# Altium PCB PCB1.PcbDoc
Units mm, origin at the board's own origin, x right, y up, seen from the top; angles counter-clockwise.
Board outline 147 x 102 mm, 2 copper layers (Top Layer, Bottom Layer); 6 components, 8 nets, 22 pads, 0 vias.
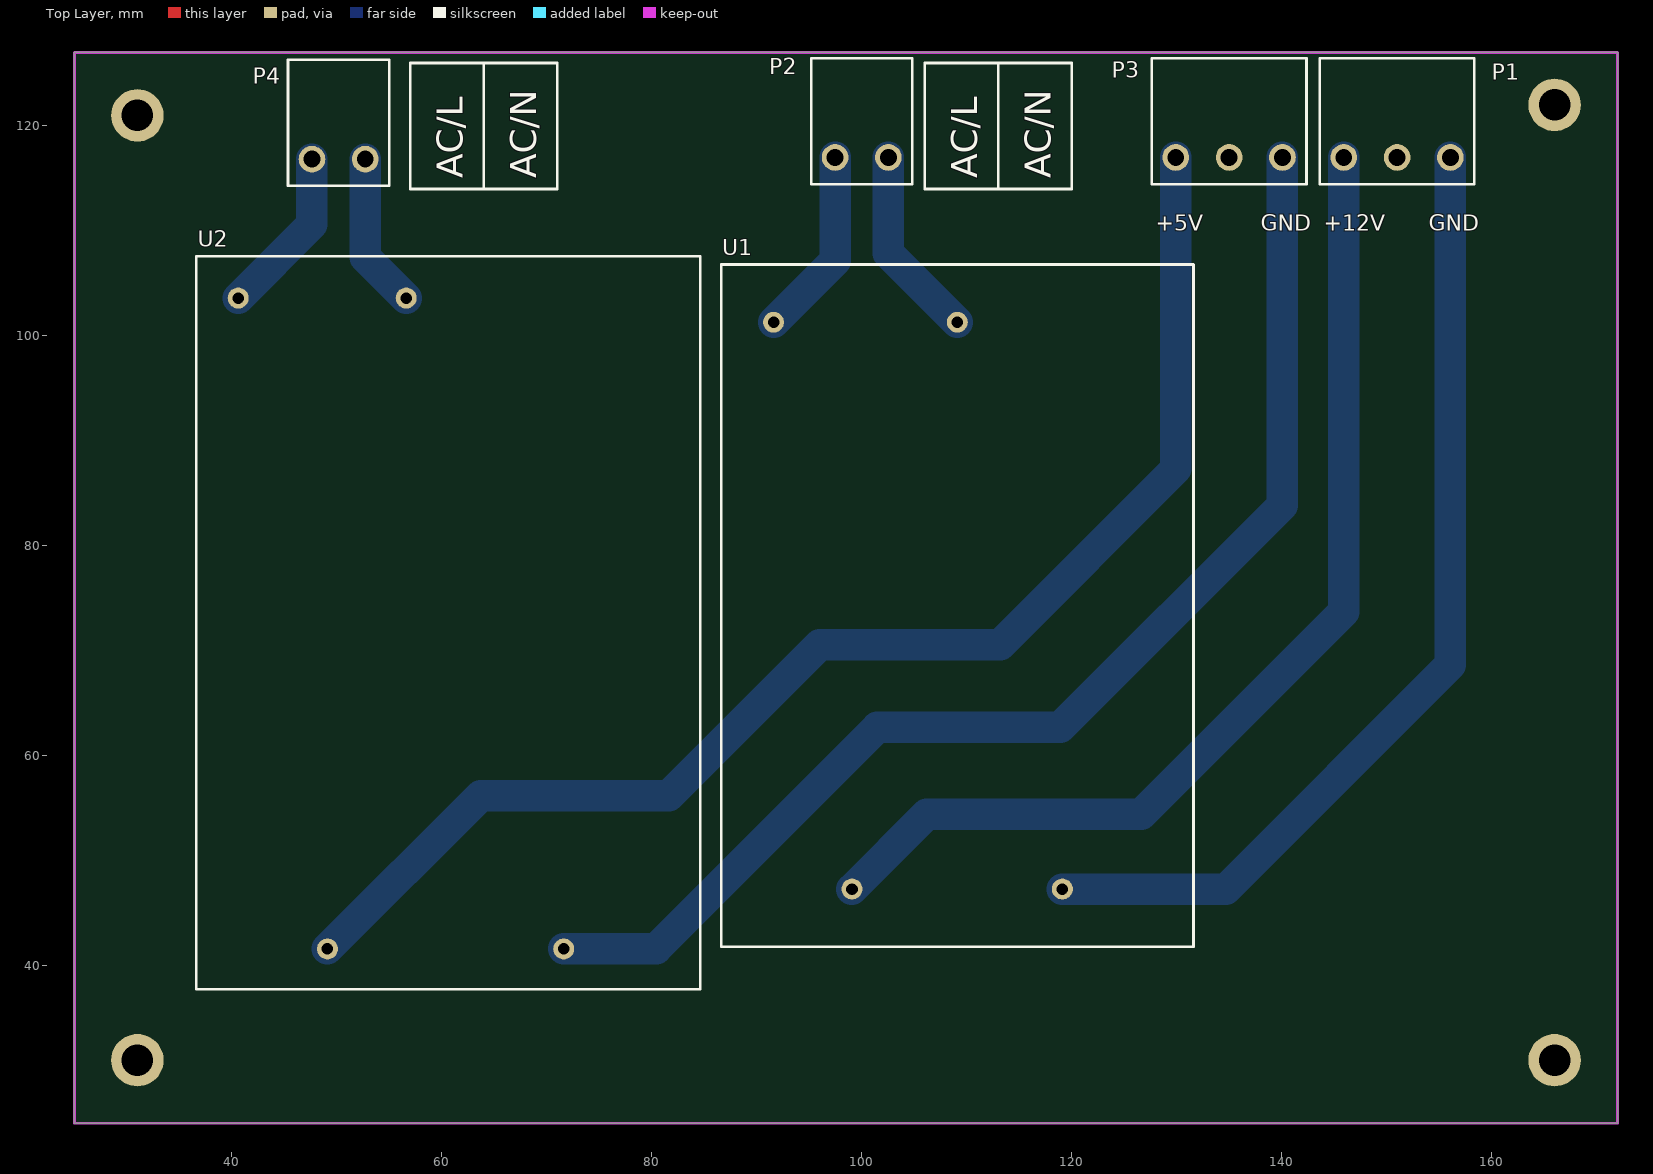
[diagram p0: Top Layer view]
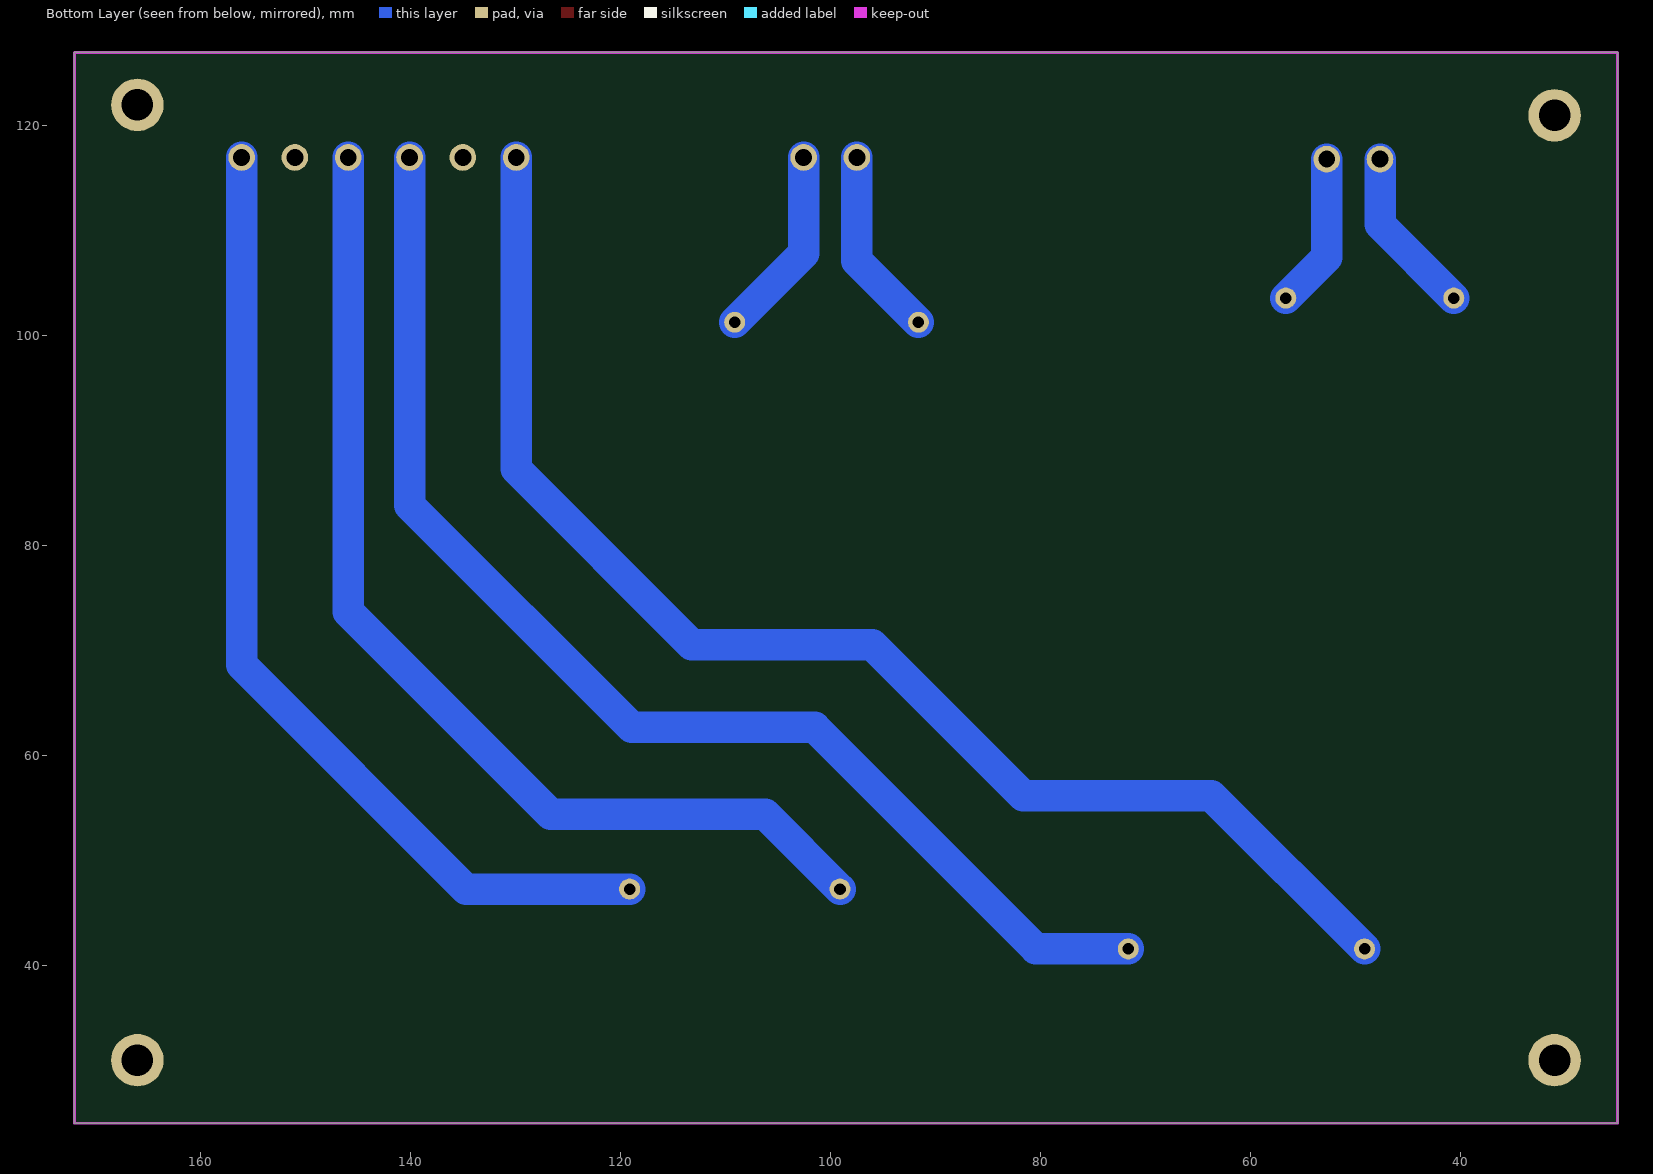
[diagram p1: Bottom Layer view, seen from below]
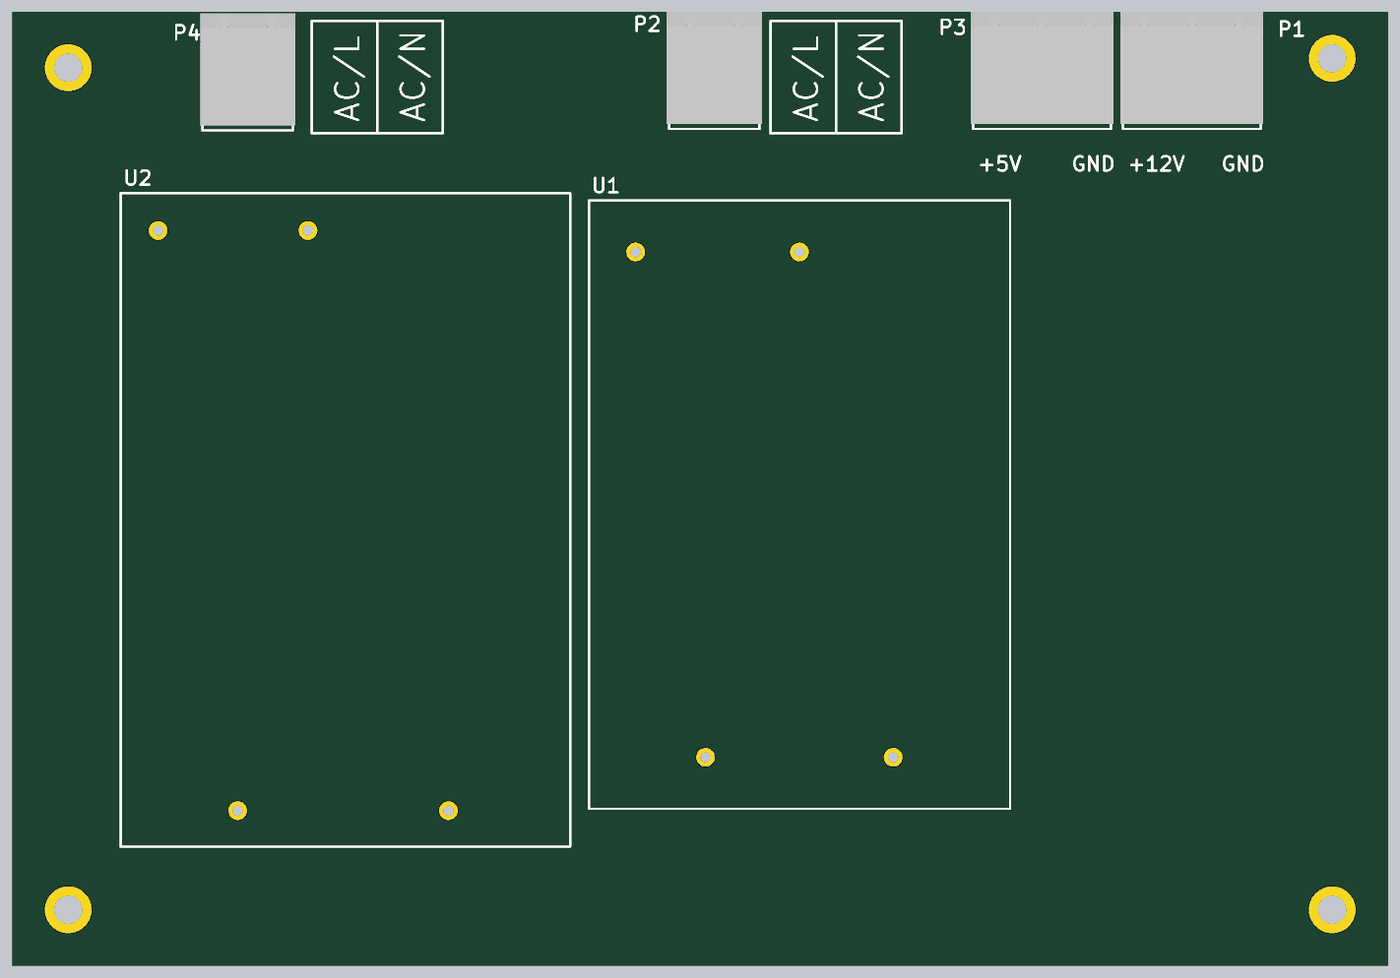
[diagram p2: 3D render of the assembled board from above, using the file's embedded part models]

## Layer stack, top to bottom
Top Solder: solder mask 0.0102, Solder Resist, Dk 3.5
Top Layer: signal copper 0.0356
Dielectric 1: dielectric 0.32, FR-4, Dk 4.8
Bottom Layer: signal copper 0.0356
Bottom Solder: solder mask 0.0102, Solder Resist, Dk 3.5

## Board outline
25,25 172,25 172,127 25,127

## Design rules (kind name [scope] priority, off if disabled: settings)
Clearance [All] p1: gap=0.254
PolygonConnect [All] p1: connectstyle=Relief reliefconductorwidth=0.254 reliefentries=4 polygonreliefangle="90 Angle" airgapwidth=0.254
RoomDefinition Sheet1 [InComponentClass('Sheet1')] p1: confinementstyle=ConfineIn formatcopy=TRUE lockcomponents=FALSE outline 25.4,25.4 172,25.4 172,127 25.4,127
RoutingVias [All] p1: holewidth=0.711 width=1.27 viastyle="Through Hole" minholewidth=0.711 minwidth=1.27 maxholewidth=0.711 maxwidth=1.27
SolderMaskExpansion [All] p1: expansion=0.102
Width [All] p1: maxlimit=5 minlimit=0.254 preferedwidth=5
30 further rules are at their usual default settings.

## Components (designator, comment, footprint, x,y, rotation, side; value= is the part's Value field where it differs from the comment)
P1 "Terminal Block 3x5.08mm" "Socket 3x5.08" 151,117 r270 top
P2 "Terminal Block 2x5.08mm" "Socket 2x5.08" 100,117 r270 top
P3 "Terminal Block 3x5.08mm" "Socket 3x5.08" 135,117 r270 top
P4 "Terminal Block 2x5.08mm" "Socket 2x5.08" 50.165,116.84 r270 top
U1 "NFM-10" NFM-10 131.6,106.8 r270 top
U2 "NFM-15" NFM-15 36.6,107.6 r270 top

## Footprints (in the part's own frame and the unit in brackets; to place one, negate y for a bottom-side part, rotate by r counter-clockwise, add the part's x,y. Pads: shape width x height; smd on the part's side, far side on the other; paste and mask are expansions set on the pad)
NFM-10 [mm]
  rrect100% 2x2 hole 1.1: +V(59.5,-32.53) -V(59.5,-12.49) AC/L(5.5,-40) AC/N(5.5,-22.5)
  silkscreen extent 0,-45 65,0
NFM-15 [mm]
  rrect100% 2x2 hole 1.1: +V(66,12.5) -V(66,35.01) AC/L(4,4) AC/N(4,20)
  silkscreen extent 0,0 69.85,48
"Socket 2x5.08" [mm]
  round 2.54 hole 1.6: 1(0,2.54) 2(0,-2.54)
  silkscreen extent -9.46,-4.83 2.54,4.83, body extent -9.97,-5.08 2.03,5.08, height 8.5
"Socket 3x5.08" [mm]
  round 2.54 hole 1.6: 1(0,5.08) 2(0,0) 3(0,-5.08)
  silkscreen extent -9.46,-7.37 2.54,7.37, body extent -9.97,-7.62 2.03,7.62, height 8.5

## Part data
P1 P3: library part Socket_3x5.08_RA_2Wall, "Terminal Block Socket Right Angle 3x5.08mm 2-Wall"
P2 P4: library part Socket_2x5.08_RA_2Wall, "Terminal Block Socket Right Angle 2x5.08mm 2 Wall"
U1: "AC/DC converter 10W"
U2: "AC/DC converter 15W"

## Free pads (board coordinates)
  rrect100% 5x5 hole 3: 0(31,31) 0(31,121) 0(166,31) 0(166,122)

## Nets (pads, with @x,y where several pads share a name; then routed paths per layer and width w, separated by ;. In a path a pad name is that pad's centre, name@x,y a point inside that pad or via, vN(x,y) a via of type N, cw(c..) or ccw(c..) an arc to the next point about the centre after c; other vN are vias at no path point)
+5V: P3.3 U2.+V | length 129.4
  Bottom Layer w3: U2.+V 63.7,56.2 81.608,56.2 96.004,70.596 113.196,70.596 129.92,87.32 P3.3
+12V: P1.3 U1.+V | length 101.1
  Bottom Layer w3: U1.+V 106.185,54.415 126.615,54.415 145.92,73.72 P1.3
GND1: P1.1 U1.-V | length 94.1
  Bottom Layer w3: U1.-V 134.7,47.3 156.08,68.68 P1.1
GND2: P3.1 U2.-V | length 119.1
  Bottom Layer w3: U2.-V 80.4,41.6 101.5,62.7 118.9,62.7 140.08,83.88 P3.1
NetP2_1: P2.1 U1.AC/N | length 18.4
  Bottom Layer w3: P2.1 102.54,107.86 U1.AC/N
NetP2_2: P2.2 U1.AC/L | length 18.1
  Bottom Layer w3: U1.AC/L 97.46,107.16 P2.2
NetP4_1: P4.1 U2.AC/N | length 14.9
  Bottom Layer w3: P4.1 52.705,107.495 U2.AC/N
NetP4_2: P4.2 U2.AC/L | length 16.1
  Bottom Layer w3: U2.AC/L 47.625,110.625 P4.2
pads on no net: P1.2 P3.2

## Keep-outs
Keep-Out Layer:
  the board outline again, w0.254

## Silkscreen, mask and mechanical layers (free items; w line width, h text height)
Top Overlay:
  lines w0.254: 64,114 64,126 ; 113,114 113,126 ; 57,114 71,114 71,126 57,126 57,114 ; 106,114 106,126 120,126 120,114 106,114
  text "AC/L" at 62,115 h2.5 r90
  text "AC/N" at 69,115 h2.5 r90
  text "AC/L" at 111,115 h2.5 r90
  text "AC/N" at 118,115 h2.5 r90
  text "+5V" at 128,110 h1.52
  text "GND" at 138,110 h1.52
  text "+12V" at 144,110 h1.52
  text "GND" at 154,110 h1.52